# Altium PCB LCR.PcbDoc
Units mm, origin at the board's own origin, x right, y up, seen from the top; angles counter-clockwise.
Board outline 100 x 80 mm, 2 copper layers (Top, Bottom); 95 components, 118 nets, 438 pads, 285 vias.
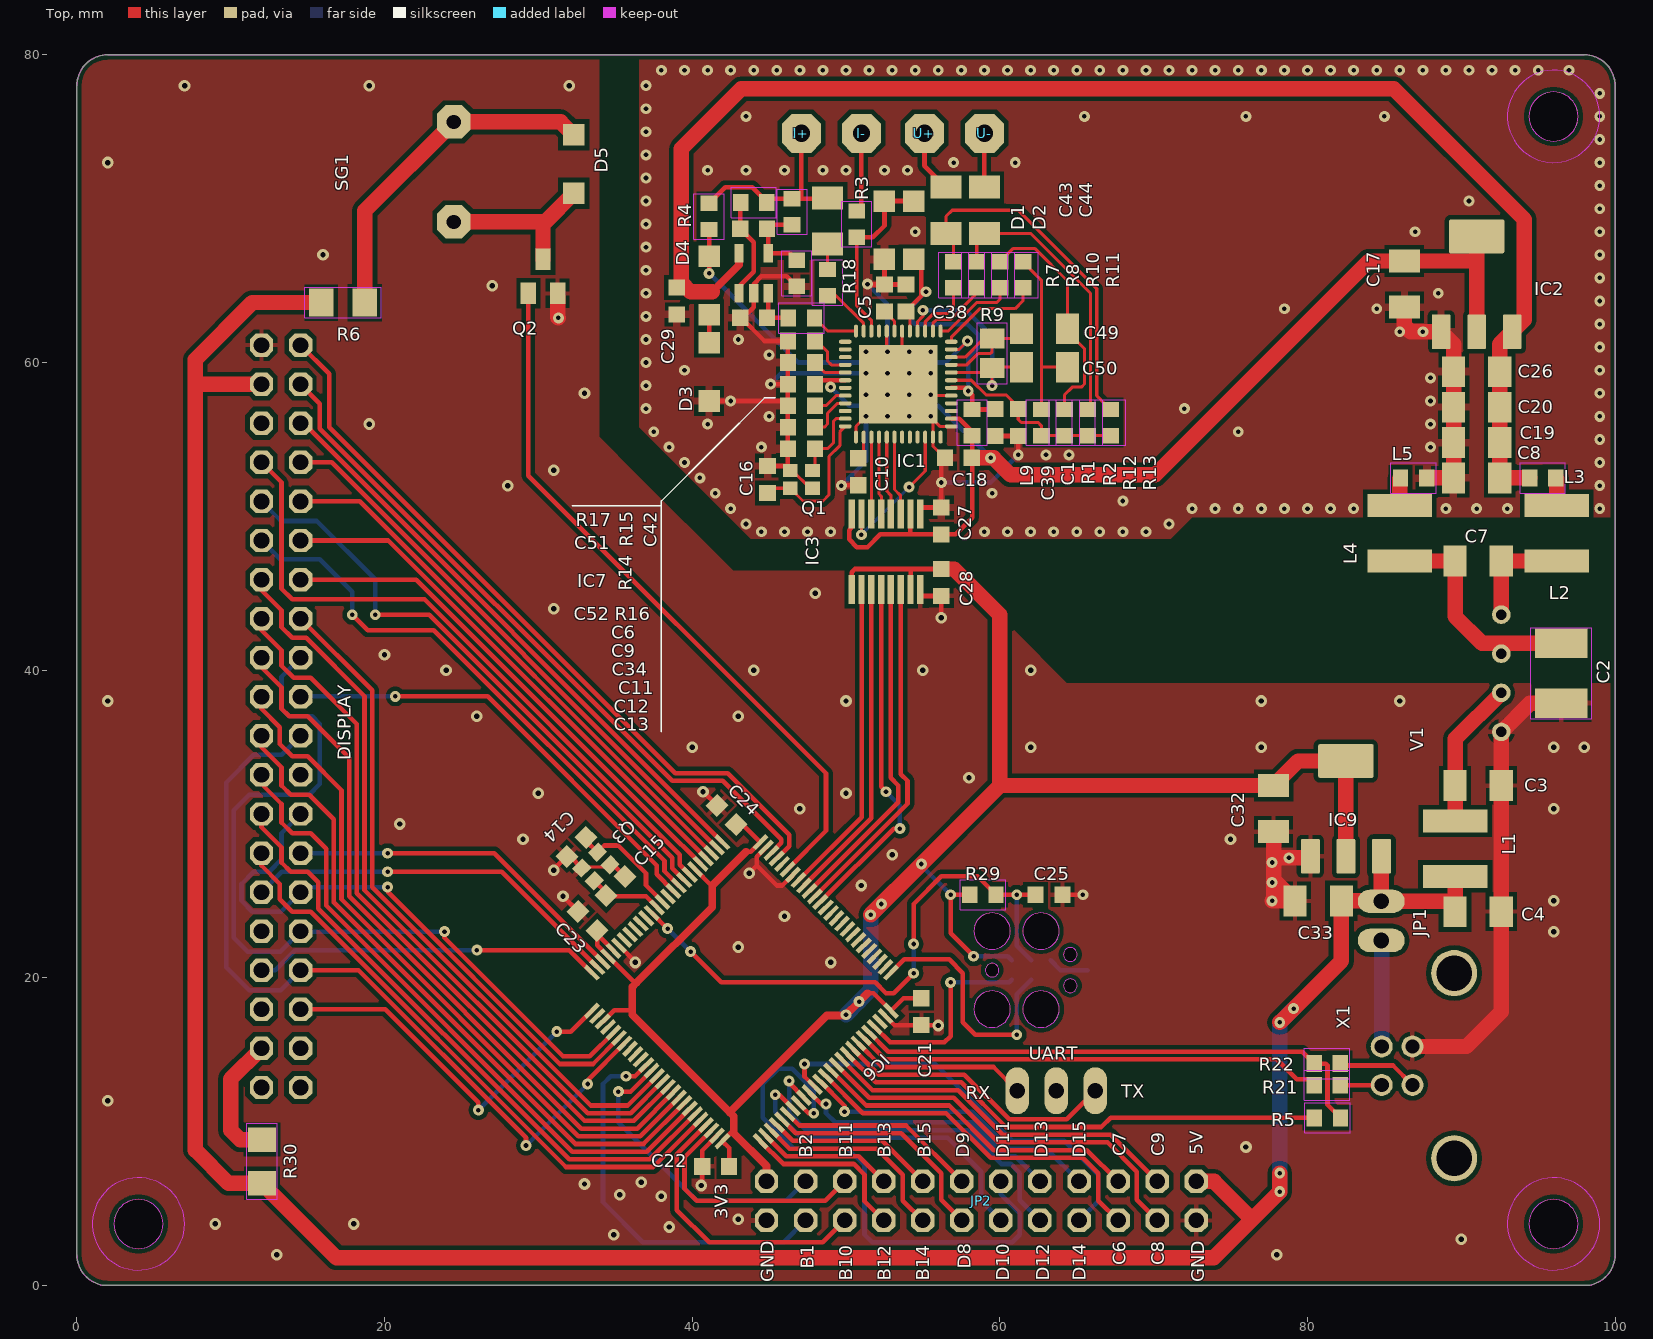
[diagram p0: Top view]
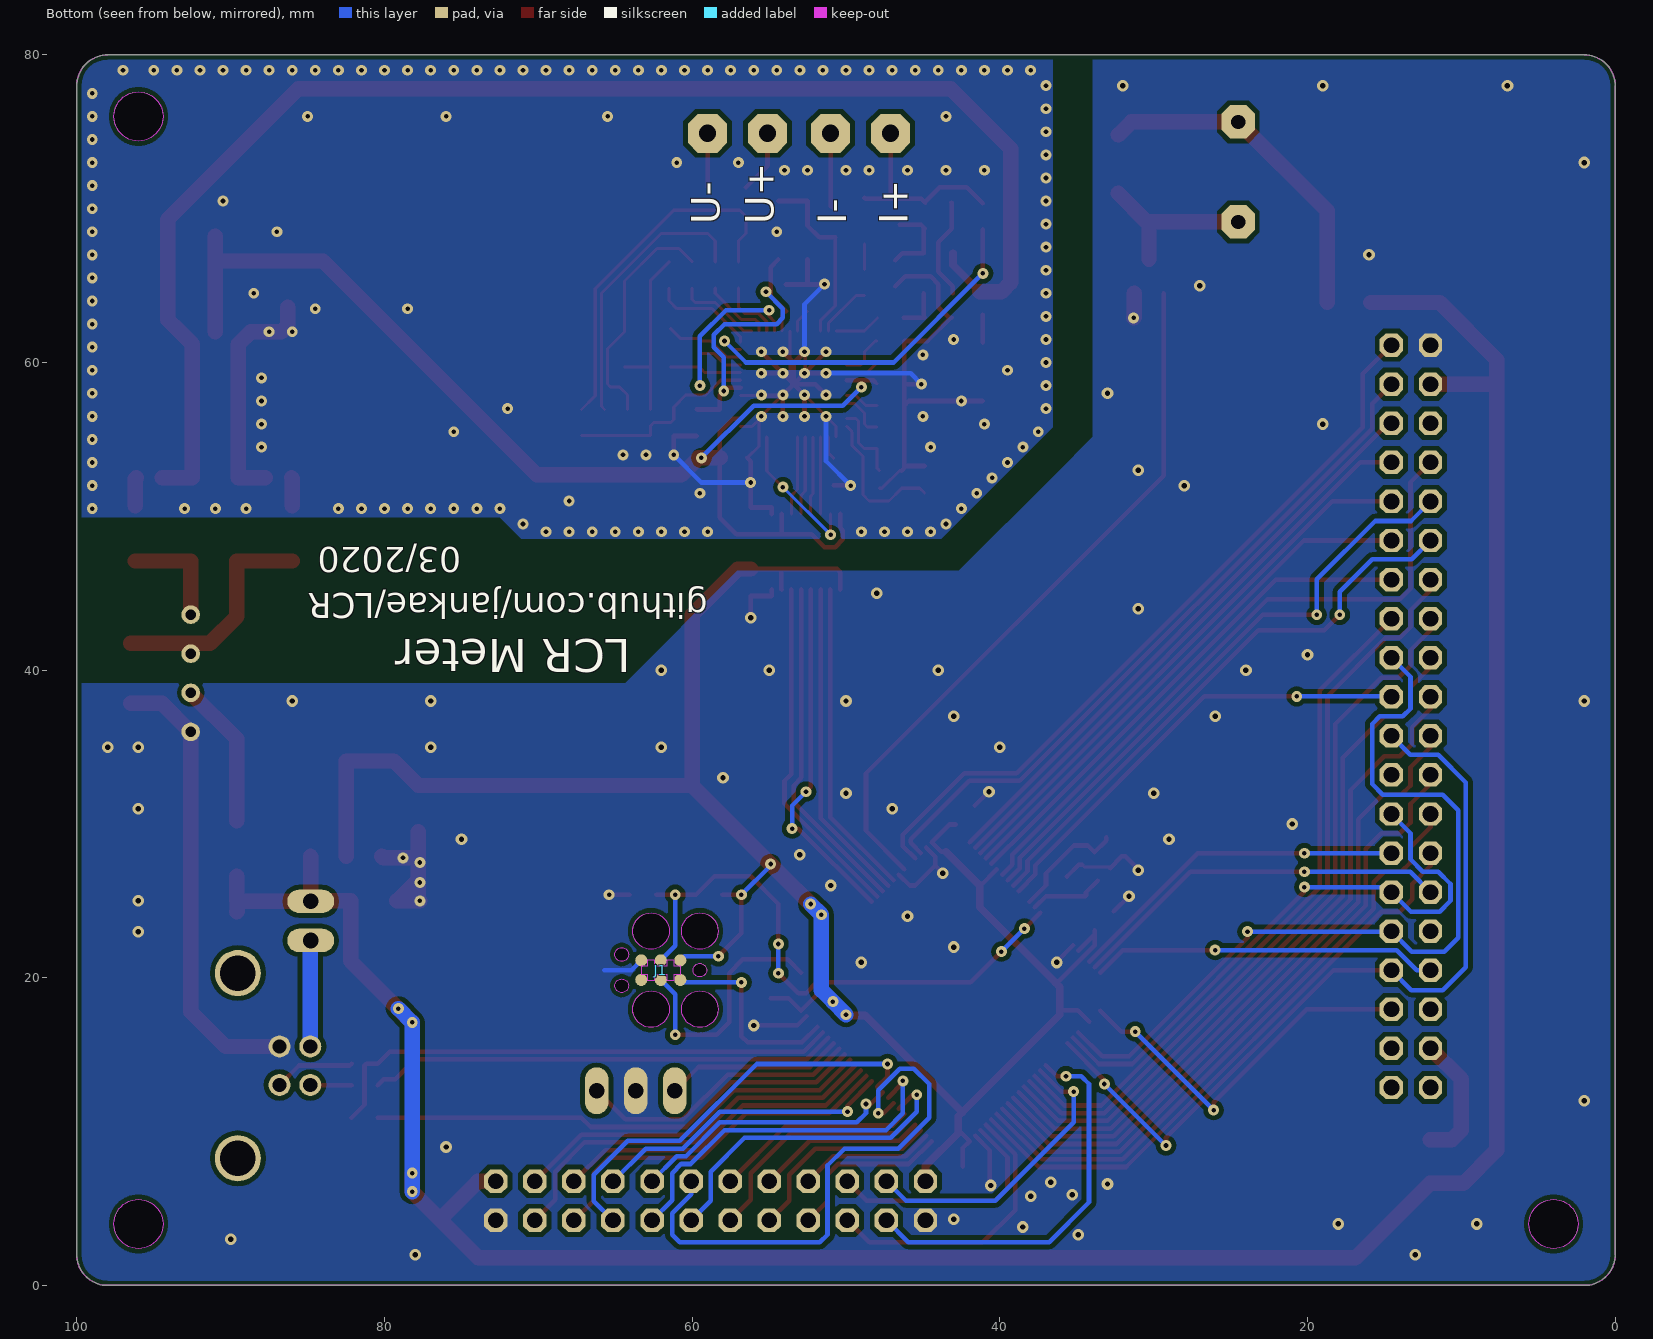
[diagram p1: Bottom view, seen from below]

## Layer stack, top to bottom
Top Solder: solder mask 0.0102, Solder Resist, Dk 3.5
Top: signal copper 0.035
Dielectric 1: dielectric 0.32, FR-4, Dk 4.8
Bottom: signal copper 0.035
Bottom Solder: solder mask 0.0102, Solder Resist, Dk 3.5

## Board outline
0,2 0,78 cw(c2,78) 2,80 98,80 cw(c98,78) 100,78 100,2 cw(c98,2) 98,0 2,0 cw(c2,2)
cut-out: 4,2.4 ccw(c4,4) 5.6,4 ccw(c4,4) 4,5.6 ccw(c4,4) 2.4,4 ccw(c4,4)
cut-out: 96,74.4 ccw(c96,76) 97.6,76 ccw(c96,76) 96,77.6 ccw(c96,76) 94.4,76 ccw(c96,76)
cut-out: 96,2.4 ccw(c96,4) 97.6,4 ccw(c96,4) 96,5.6 ccw(c96,4) 94.4,4 ccw(c96,4)
cut-out: 59.5,21.853 ccw(c59.5,23.04) 60.687,23.04 ccw(c59.5,23.04) 59.5,24.228 ccw(c59.5,23.04) 58.313,23.04 ccw(c59.5,23.04)
cut-out: 59.5,16.773 ccw(c59.5,17.96) 60.687,17.96 ccw(c59.5,17.96) 59.5,19.148 ccw(c59.5,17.96) 58.313,17.96 ccw(c59.5,17.96)
cut-out: 62.675,16.773 ccw(c62.675,17.96) 63.862,17.96 ccw(c62.675,17.96) 62.675,19.148 ccw(c62.675,17.96) 61.488,17.96 ccw(c62.675,17.96)
cut-out: 62.675,21.853 ccw(c62.675,23.04) 63.862,23.04 ccw(c62.675,23.04) 62.675,24.228 ccw(c62.675,23.04) 61.488,23.04 ccw(c62.675,23.04)
cut-out: 59.5,20.056 ccw(c59.5,20.5) 59.945,20.5 ccw(c59.5,20.5) 59.5,20.945 ccw(c59.5,20.5) 59.056,20.5 ccw(c59.5,20.5)
cut-out: 64.58,21.072 ccw(c64.58,21.516) 65.025,21.516 ccw(c64.58,21.516) 64.58,21.961 ccw(c64.58,21.516) 64.136,21.516 ccw(c64.58,21.516)
cut-out: 64.58,19.04 ccw(c64.58,19.484) 65.025,19.484 ccw(c64.58,19.484) 64.58,19.929 ccw(c64.58,19.484) 64.136,19.484 ccw(c64.58,19.484)

## Design rules (kind name [scope] priority, off if disabled: settings)
BoardOutlineClearance mdCopperDimension [All] p1: gap=0.254 ignorepadtopadclearanceinfootprint=FALSE except(0: Arc-SplitContinuation Track-SplitContinuation SMDPad-SplitContinuation THPad-SplitContinuation Via-SplitContinuation Fill-SplitContinuation Poly-SplitContinuation Region-SplitContinuation Text-SplitContinuation; 0.2: Poly-OutlineEdge Poly-CavityEdge Poly-CutoutEdge Poly-SplitBarrior)
Clearance Clearance_for_PolygonClass_Isolate_11.81 [InPolygonClass('Isolate_11.81') vs IsArc Or IsTrack Or IsPad Or IsVia Or IsFill Or IsRegion Or IsText] p1: gap=0.3 ignorepadtopadclearanceinfootprint=FALSE
Clearance "Clearance (Same Net)" [All] p2: gap=0.089 ignorepadtopadclearanceinfootprint=FALSE
Clearance [All] p3: gap=0.089 ignorepadtopadclearanceinfootprint=FALSE
HoleSize [All] p1: absolutevalues=TRUE maxlimit=2540 minlimit=0.3 maxpercent=80.000 minpercent=20.000
HoleToHoleClearance mdDrill [All] p1: gap=0.2 allowstackedmicrovias=TRUE
MinimumSolderMaskSliver [All] p1 off: minsoldermaskwidth=0.254
PasteMaskExpansion Expansion_SMDPaste_OFF [InPadClass('SMDPaste_OFF')] p1: expansion=0
PasteMaskExpansion mlMinCreamFrame [All] p2: expansion=0
PolygonConnect PolygonConnect_For_PolygonThermal_ON_Width196900_Gap100000 [InPolygonClass('PolygonThermal_ON_Width196900_Gap100000') vs Not IsVia] p1: connectstyle=Relief reliefconductorwidth=0.5 reliefentries=4 polygonreliefangle="90 Angle" airgapwidth=0.254
PolygonConnect PolygonConnect_For_PolygonThermal_ON_Width118100_Gap100000 [InPolygonClass('PolygonThermal_ON_Width118100_Gap100000') vs Not IsVia] p2: connectstyle=Relief reliefconductorwidth=0.3 reliefentries=4 polygonreliefangle="90 Angle" airgapwidth=0.254
PolygonConnect ThermalVias [IsVia] p3: connectstyle=Direct reliefconductorwidth=0.254 reliefentries=4 polygonreliefangle="90 Angle" airgapwidth=0.254
PolygonConnect [All] p4: connectstyle=Relief reliefconductorwidth=0.254 reliefentries=4 polygonreliefangle="90 Angle" airgapwidth=0.254
RoutingVias [All] p1: holewidth=0.3 width=0.706 viastyle="Through Hole" minholewidth=0.3 minwidth=0.706 maxholewidth=2.54 maxwidth=2.54
SolderMaskExpansion Expansion_SMDSolder_OFF [InPadClass('SMDSolder_OFF')] p1: expansion=0 istentingtop=FALSE
SolderMaskExpansion mlMinStopFrame [All] p2: expansion=0.102 istentingtop=FALSE
Width [All] p1: maxlimit=0.254 minlimit=0.152 preferedwidth=0.152
26 further rules are at their usual default settings.

## Classes and differential pairs
polygon class PolygonThermal_ON_Width196900_Gap100000: Polygon_1_Net_AGND Polygon_2_Net_AGND
polygon class PolygonThermal_ON_Width118100_Gap100000: Polygon_1_Net_GND Polygon_2_Net_GND
polygon class Isolate_11.81: Polygon_1_Net_AGND Polygon_1_Net_GND Polygon_2_Net_AGND Polygon_2_Net_GND
pad class SMDSolder_OFF: Q1-1 Q1-2 Q1-3 Q1-4 Q3-1 Q3-2 Q3-3 Q3-4
pad class SMDPaste_OFF: J1-1 J1-2 J1-3 J1-4 J1-5 J1-6 Q1-1 Q1-2 Q1-3 Q1-4 Q3-1 Q3-2 Q3-3 Q3-4

## Components (designator, comment, footprint, x,y, rotation, side; value= is the part's Value field where it differs from the comment)
C1 "470n" C0603K 61.2,56.1 r270 top
C2 "470p/3kV" C1812 96.5,39.8 r270 top
C3 "10u/16V" C1206K 91.1,32.5 r0 top
C4 "10u/16V" C1206K 91.1,24.3 r0 top
C5 "4u7" C0603K 52.5,64.2 r90 top
C6 "470n" C0603K 47.1,61.4 r180 top
C7 "10u/25V" C1206K 91.1,47.1 r180 top
C8 "10u/25V" C1206K 91,52.5 r180 top
C9 "470n" C0603K 47.1,60 r180 top
C10 "470n" C0603K 50.8,52.9 r270 top
C11 "100n" C0603K 47.1,57.2 r180 top
C12 "1u" C0603K 47.1,55.8 r180 top
C13 "10p" C0603K 47.1,54.4 r180 top
C14 "12p" C0603K 32.469,28.514 r225 top
C15 "12p" C0603K 35.014,25.969 r45 top
C16 "10p" C0603K 44.9,52.4 r90 top
C17 "10u/16V" C1206K 86.3,65.1 r270 top
C18 "100n" C0603K 57.3,53.8 r180 top
C19 "10u/25V" C1206K 91,54.8 r180 top
C20 "10u/25V" C1206K 91,57.1 r180 top
C21 "100n" C0603K 54.9,17.8 r90 top
C22 "100n" C0603K 41.53,7.733 r0 top
C23 "100n" C0603K 33.2,23.7 r315 top
C24 "100n" C0603K 42.241,30.583 r315 top
C25 "100n" C0603K 63.2,25.4 r0 top
C26 "10u/25V" C1206K 91,59.4 r180 top
C27 "100n" C0603K 56.2,49.7 r90 top
C28 "100n" C0603K 56.2,45.7 r270 top
C29 "1u" C0603K 39,64 r90 top
C32 "10u/16V" C1206K 77.8,31 r270 top
C33 "10u/16V" C1206K 80.7,25 r180 top
C34 "100n" C0603K 47.1,58.6 r180 top
C38 "100n" C0603K 53.9,64.2 r90 top
C39 "100n" C0603K 59.7,56.1 r270 top
C42 "10u" C1206K 48.8,69.2 r90 top
C43 "10u" C1206K 56.5,69.9 r90 top
C44 "10u" C1206K 59,69.9 r90 top
C49 "10u" C1206K 62.9,62.2 r180 top
C50 "10u" C1206K 62.9,59.7 r180 top
C51 "100n" C0603K 44,68.7 r180 top
C52 "100n" C0603K 44,62.9 r0 top
D1 "BAS116" SOD123 52.5,68.6 r270 top
D2 "BAS116" SOD123 54.4,68.6 r90 top
D3 "BAS116" SOD123 41.1,59.4 r90 top
D4 "BAS116" SOD123 41.1,65 r90 top
D5 "4148" SOD123 32.3,72.9 r270 top
DISPLAY "SAINSMART_TFT_3.2V" SAINSMART_ANGLED 12,37 r270 top
I+ "" 2,54/1,1 47.1,74.9 r90 top
I- "" 2,54/1,1 51,74.9 r90 top
IC1 "AD5941" QFN50P700X700X80-49T510N 53.4,58.6 r0 top
IC2 "VREG-TS1117CW-3V3" SOT223 91,65.1 r90 top
IC3 "SI8651EB-B-IU" SOP63P600X175-16N 52.6,47.7 r90 top
IC6 "STM32F303VCT" LQFP100 43.2,19.1 r225 top
IC7 "OPA237N" SOT23-5 44,65.8 r0 top
IC9 "VREG-TS1117CW-3V3" SOT223 82.5,31 r90 top
J1 "" TC2030-MCP 59.5,20.5 r0 bottom
JP1 "" 1X02 84.8,23.7 r270 top
JP2 "" 2X12 58.8,5.5 r0 top
L1 "SRN5020TA-100M" SRN5040 89.6,28.4 r90 top
L2 "SRN5020TA-100M" SRN5040 96.2,48.9 r90 top
L3 "Ferrite" R0603 95.3,52.5 r180 top
L4 "SRN5020TA-100M" SRN5040 86,48.9 r90 top
L5 "Ferrite" R0603 86.9,52.5 r0 top
L9 "Ferrite" R0603 58.2,56.1 r90 top
Q1 "FA-128" FA-128 47.1,52.4 r180 top
Q2 "BSS123" SOT23 30.3,65.6 r0 top
Q3 "FA-128" FA-128 33.741,27.241 r225 top
R1 "1M" R0603 62.7,56.1 r270 top
R2 "1M" R0603 64.2,56.1 r270 top
R3 "10" R0603 50.7,69 r270 top
R4 "100k" R0603 41.1,69.5 r270 top
R5 "1k5" R0603 81.3,10.9 r180 top
R6 "27" R1206 17.3,63.9 r180 top
R7 "10k" R0603 57,65.7 r90 top
R8 "10k" R0603 58.5,65.7 r90 top
R9 "1k 0.01% 2ppm" M0805 59.5,60.6 r270 top
R10 "10k" R0603 60,65.7 r90 top
R11 "10k" R0603 61.5,65.7 r90 top
R12 "1M" R0603 65.7,56.1 r270 top
R13 "1M" R0603 67.2,56.1 r270 top
R14 "10k" R0603 46.8,65.8 r90 top
R15 "39k" R0603 46.5,69.8 r270 top
R16 "10k" R0603 47.1,62.9 r0 top
R17 "100" R0603 44,70.4 r180 top
R18 "10" R0603 48.8,65.2 r270 top
R21 "22" R0603 81.28,13.018 r0 top
R22 "22" R0603 81.28,14.423 r0 top
R29 "10k" R0603 58.9,25.4 r0 top
R30 "27" R1206 12.035,8.062 r270 top
SG1 "CEM-1203(42)" F/QMBIII 24.5,72.4 r90 top
U+ "" 2,54/1,1 55.1,74.9 r90 top
U- "" 2,54/1,1 59,74.9 r90 top
UART "" 1X03 63.667,12.66 r0 top
V1 "TBA-1 0512" TME 92.6,39.8 r90 top
X1 "MINI-USB_SHIELD4P-85-32004-00X" 85-32004-00X 89.535,14.287 r180 top

## Footprints (in the part's own frame and the unit in brackets; to place one, negate y for a bottom-side part, rotate by r counter-clockwise, add the part's x,y. Pads: shape width x height; smd on the part's side, far side on the other; paste and mask are expansions set on the pad)
1X02 [mil] "1X02"
  oval 60x120 hole 40: 1(-50,0) 2(50,0)
1X03 [mil] "1X03"
  oval 60x120 hole 40: 1(-100,0) 2(0,0) 3(100,0)
2,54/1,1 [mil] "2,54/1,1"
  oct 100x100 / inner round 92.39 / far side oct 100x100 hole 44: 1(0,0)
2X12 [mil] "2X12"
  oct 60x60 / inner round 55.43 / far side oct 60x60 hole 40: 1(-550,-50) 2(-550,50) 3(-450,-50) 4(-450,50) 5(-350,-50) 6(-350,50) 7(-250,-50) 8(-250,50) 9(-150,-50) 10(-150,50) 11(-50,-50) 12(-50,50) 13(50,-50) 14(50,50) 15(150,-50) 16(150,50) 17(250,-50) 18(250,50) 19(350,-50) 20(350,50) 21(450,-50) 22(450,50) 23(550,-50) 24(550,50)
85-32004-00X [mm] "85-32004-00X"
  round 1.428 hole 0.92: 1(4.71,-1.25) 2(4.71,1.25) 3(2.71,1.25) 4(2.71,-1.25)
  round 3 hole 2.3: M1(0,6.02) M2(0,-6.02)
C0603K [mm] "C0603K"
  rect 1.05x1.08 smd: 1(-0.875,0) 2(0.875,0)
C1206K [mm] "C1206K"
  rect 1.5x2 smd: 1(-1.5,0) 2(1.5,0)
C1812 [mm] "C1812"
  rect 1.9x3.4 smd: 1(-1.95,0) 2(1.95,0)
  Top keep-out lines w0.051: 2.973,-1.983 2.973,1.983 -2.973,1.983 -2.973,-1.983 2.973,-1.983
F/QMBIII [mil] "F/QMBIII"
  oct 85x85 / inner round 78.53 / far side oct 85x85 hole 36: +(128,0) -(-128,0)
FA-128 [mm] "FA-128"
  rect 0.95x0.85 smd paste+0 mask+0: 1(-0.725,-0.575) 2(0.725,-0.575) 3(0.725,0.575) 4(-0.725,0.575)
LQFP100 [mm] "LQFP100"
  rect 0.3x1.2 smd: 1(-6,-7.75) 2(-5.5,-7.75) 3(-5,-7.75) 4(-4.5,-7.75) 5(-4,-7.75) 6(-3.5,-7.75) 7(-3,-7.75) 8(-2.5,-7.75) 9(-2,-7.75) 10(-1.5,-7.75) 11(-1,-7.75) 12(-0.5,-7.75) 13(0,-7.75) 14(0.5,-7.75) 15(1,-7.75) 16(1.5,-7.75) 17(2,-7.75) 18(2.5,-7.75) 19(3,-7.75) 20(3.5,-7.75) 21(4,-7.75) 22(4.5,-7.75) 23(5,-7.75) 24(5.5,-7.75) 25(6,-7.75) 51(6,7.75) 52(5.5,7.75) 53(5,7.75) 54(4.5,7.75) 55(4,7.75) 56(3.5,7.75) 57(3,7.75) 58(2.5,7.75) 59(2,7.75) 60(1.5,7.75) 61(1,7.75) 62(0.5,7.75) 63(0,7.75) 64(-0.5,7.75) 65(-1,7.75) 66(-1.5,7.75) 67(-2,7.75) 68(-2.5,7.75) 69(-3,7.75) 70(-3.5,7.75) 71(-4,7.75) 72(-4.5,7.75) 73(-5,7.75) 74(-5.5,7.75) 75(-6,7.75)
  rect 1.2x0.3 smd: 26(7.75,-6) 27(7.75,-5.5) 28(7.75,-5) 29(7.75,-4.5) 30(7.75,-4) 31(7.75,-3.5) 32(7.75,-3) 33(7.75,-2.5) 34(7.75,-2) 35(7.75,-1.5) 36(7.75,-1) 37(7.75,-0.5) 38(7.75,0) 39(7.75,0.5) 40(7.75,1) 41(7.75,1.5) 42(7.75,2) 43(7.75,2.5) 44(7.75,3) 45(7.75,3.5) 46(7.75,4) 47(7.75,4.5) 48(7.75,5) 49(7.75,5.5) 50(7.75,6) 76(-7.75,6) 77(-7.75,5.5) 78(-7.75,5) 79(-7.75,4.5) 80(-7.75,4) 81(-7.75,3.5) 82(-7.75,3) 83(-7.75,2.5) 84(-7.75,2) 85(-7.75,1.5) 86(-7.75,1) 87(-7.75,0.5) 88(-7.75,0) 89(-7.75,-0.5) 90(-7.75,-1) 91(-7.75,-1.5) 92(-7.75,-2) 93(-7.75,-2.5) 94(-7.75,-3) 95(-7.75,-3.5) 96(-7.75,-4) 97(-7.75,-4.5) 98(-7.75,-5) 99(-7.75,-5.5) 100(-7.75,-6)
M0805 [mm] "M0805"
  rect 1.3x1.6 smd: 1(-0.95,0) 2(0.95,0)
  Top keep-out lines w0.051: 1.973,-0.983 1.973,0.983 -1.973,0.983 -1.973,-0.983 1.973,-0.983
QFN50P700X700X80-49T510N [mm] "QFN50P700X700X80-49T510N"
  rrect100% 0.838x0.264 smd: 1(-3.446,2.75) 2(-3.446,2.25) 3(-3.446,1.75) 4(-3.446,1.25) 5(-3.446,0.75) 6(-3.446,0.25) 7(-3.446,-0.25) 8(-3.446,-0.75) 9(-3.446,-1.25) 10(-3.446,-1.75) 11(-3.446,-2.25) 12(-3.446,-2.75) 25(3.446,-2.75) 26(3.446,-2.25) 27(3.446,-1.75) 28(3.446,-1.25) 29(3.446,-0.75) 30(3.446,-0.25) 31(3.446,0.25) 32(3.446,0.75) 33(3.446,1.25) 34(3.446,1.75) 35(3.446,2.25) 36(3.446,2.75)
  rrect100% 0.264x0.838 smd: 13(-2.75,-3.446) 14(-2.25,-3.446) 15(-1.75,-3.446) 16(-1.25,-3.446) 17(-0.75,-3.446) 18(-0.25,-3.446) 19(0.25,-3.446) 20(0.75,-3.446) 21(1.25,-3.446) 22(1.75,-3.446) 23(2.25,-3.446) 24(2.75,-3.446) 37(2.75,3.446) 38(2.25,3.446) 39(1.75,3.446) 40(1.25,3.446) 41(0.75,3.446) 42(0.25,3.446) 43(-0.25,3.446) 44(-0.75,3.446) 45(-1.25,3.446) 46(-1.75,3.446) 47(-2.25,3.446) 48(-2.75,3.446)
  rect 5.1x5.1 smd: 49(0,0)
R0603 [mm] "R0603"
  rect 1x1.1 smd: 1(-0.85,0) 2(0.85,0)
  Top keep-out lines w0.051: 1.473,0.983 1.473,-0.983 -1.473,-0.983 -1.473,0.983 1.473,0.983
R1206 [mm] "R1206"
  rect 1.6x1.803 smd: 1(-1.422,0) 2(1.422,0)
  Top keep-out lines w0.051: 2.473,0.983 2.473,-0.983 -2.473,-0.983 -2.473,0.983 2.473,0.983
SAINSMART_ANGLED [mil] "SAINSMART_ANGLED"
  oct 60x60 / inner round 55.43 / far side oct 60x60 hole 40: 1(-950,0) 2(-950,100) 3(-850,0) 4(-850,100) 5(-750,0) 6(-750,100) 7(-650,0) 8(-650,100) 9(-550,0) 10(-550,100) 11(-450,0) 12(-450,100) 13(-350,0) 14(-350,100) 15(-250,0) 16(-250,100) 17(-150,0) 18(-150,100) 19(-50,0) 20(-50,100) 21(50,0) 22(50,100) 23(150,0) 24(150,100) 25(250,0) 26(250,100) 27(350,0) 28(350,100) 29(450,0) 30(450,100) 31(550,0) 32(550,100) 33(650,0) 34(650,100) 35(750,0) 36(750,100) 37(850,0) 38(850,100) 39(950,0) 40(950,100)
SOD123 [mm] "SOD123"
  rect 1.4x1.4 smd: A(1.9,0) C(-1.9,0)
SOP63P600X175-16N [mil] "SOP63P600X175-16N"
  rect 74.84x16.14 smd: 1(-96.67,87.5) 2(-96.67,62.5) 3(-96.67,37.5) 4(-96.67,12.5) 5(-96.67,-12.5) 6(-96.67,-37.5) 7(-96.67,-62.5) 8(-96.67,-87.5) 9(96.67,-87.5) 10(96.67,-62.5) 11(96.67,-37.5) 12(96.67,-12.5) 13(96.67,12.5) 14(96.67,37.5) 15(96.67,62.5) 16(96.67,87.5)
SOT23 [mm] "SOT23"
  rect 1x1.4 smd: 1(-0.95,-1.1) 2(0.95,-1.1) 3(0,1.1)
SOT23-5 [mm] "SOT23-5"
  rect 0.6x1.2 smd: 1(-0.95,-1.306) 2(0,-1.306) 3(0.95,-1.306) 4(0.95,1.306) 5(-0.95,1.306)
SOT223 [mm] "SOT223"
  rrect10% 2.235x1.219 smd: 1(-3.099,2.311) 2(-3.099,0) 3(-3.099,-2.311)
  rrect10% 2.2x3.6 smd: 4(3.099,0)
SRN5040 [mm] "SRN5040"
  rect 1.5x4.2 smd: P$1(-1.8,0) P$2(1.8,0)
TC2030-MCP [mil] "TC2030-MCP"
  rrect100% 31x31 smd paste+0: 1(50,-25) 2(50,25) 3(100,-25) 4(100,25) 5(150,-25) 6(150,25)
  Top keep-out region: 49.5,-10 65,-10 65,-25.5 85,-25.5 85,-10 115,-10 115,-25.5 135,-25.5 135,-10 150.5,-10 150.5,10 135,10 135,25.5 115,25.5 115,10 85,10 85,25.5 65,25.5 65,10 49.5,10
TME [mm] "TME"
  round 1.208 hole 0.7: 1(-3.81,0) 2(-1.27,0) 3(1.27,0) 4(3.81,0)

## Part data
C1 C5 C6 C9 C10 C11 C12 C13 C14 C15 C16 C18 C21 C22 C23 C24 C25 C27 C28 C29 C34 C38 C39 C51 C52: library part C0603K, PackageName=C0603K
C2: library part C1812, PackageName=C1812
C3 C4 C7 C8 C17 C19 C20 C26 C32 C33 C42 C43 C44 C49 C50: library part C1206K, PackageName=C1206K
D1 D2 D3 D4 D5: library part SOD123, PackageName=SOD123
DISPLAY: library part SAINSMART_ANGLED, PackageName=SAINSMART_ANGLED
I+ I- U+ U-: library part 2,54/1,1, PackageName=2,54/1,1
IC1: library part QFN50P700X700X80-49T510N, PackageName=QFN50P700X700X80-49T510N
IC2 IC9: library part SOT223, PackageName=SOT223
IC3: library part SOP63P600X175-16N, PackageName=SOP63P600X175-16N
IC6: library part LQFP100, PackageName=LQFP100
IC7: library part SOT23-5, PackageName=SOT23-5
J1: library part TC2030-MCP, PackageName=TC2030-MCP
JP1: library part 1X02, PackageName=1X02
JP2: library part 2X12, PackageName=2X12
L1 L2 L4: library part SRN5040, PackageName=SRN5040
L3 L5 L9 R1 R2 R3 R4 R5 R7 R8 R10 R11 R12 R13 R14 R15 R16 R17 R18 R21 R22 R29: library part R0603, PackageName=R0603
Q2: library part SOT23, PackageName=SOT23
R6 R30: library part R1206, PackageName=R1206
R9: library part M0805, PackageName=M0805
SG1: library part F/QMBIII, PackageName=F/QMBIII
UART: library part 1X03, PackageName=1X03
V1: library part TME, PackageName=TME
X1: library part 85-32004-00X, PackageName=85-32004-00X
Q1 Q3: PackageName=FA-128

## Free pads (board coordinates)
  round 0.889 hole 0.889 unplated: MH1(59.5,20.5) MH2(64.58,21.516) MH3(64.58,19.484)
  round 3.2 hole 3.2 unplated: MH1(96,4) MH2(96,76) MH3(4,4)
  round 2.375 hole 2.375 unplated: MH4(59.5,17.96) MH5(59.5,23.04) MH6(62.675,23.04) MH7(62.675,17.96)

## Via types
v1: diameter 0.706/0.706 (per signal layer), hole 0.3, Top to Bottom, 220 vias
v2: diameter 0.756/0.756 (per signal layer), hole 0.35, Top to Bottom, 65 vias

## Nets (pads, with @x,y where several pads share a name; then routed paths per layer and width w, separated by ;. In a path a pad name is that pad's centre, name@x,y a point inside that pad or via, vN(x,y) a via of type N, cw(c..) or ccw(c..) an arc to the next point about the centre after c; other vN are vias at no path point)
+3V3: C21.2 C22.2 C23.2 C24.2 C28.1 C32.1 IC3.1 IC3.7 IC6.6 IC6.21 IC6.22 IC6.28 IC6.50 IC6.75 IC6.100 IC9.2 IC9.4 J1.1 JP2.2 R29.1 | length 146.8
  Top w0.3: IC6.28 34.929,17.9 36.1,17.9 ; IC6.21 33.819,22.824 C23.2 33.819,22.117 IC6.22 36.236,19.7 36.4,19.7 ; IC6.6 41.25,26 41.3,26 ; C22.2 42.405,8.935 IC6.50 42.7,10.115 42.7,11 ; C24.2 43.296,29.964 IC6.100 43.815,28.2 43.5,28.2 ; IC3.1 50.378,46.378 50.575,46.575 54.2,46.575 ; 51.4,19 51.785,19 52.923,17.863 53.735,18.675 C21.2 ; IC3.7 54.2,45.257 54.2,46.575 ; C28.1 54.2,46.575 ; R29.1 v1(56.8,25.4) 56.8,22.9 v1(58.3,21.4)
  Top w0.5: 43.5,28.2 41.3,26 41.3,24.6 36.4,19.7 36.1,19.4 36.1,17.9 36.1,17.6 42.45,11.25 ; JP2.2 44.83,7.77 42.7,9.9 42.7,11 42.45,11.25 ; 51.4,19 v1(50.85,18.45) 49.95,17.55 48.75,17.55 42.45,11.25
  Top w1: v1(51.6,24.1) v1(54.9,27.4) 60,32.5 ; C28.1 57.025,46.575 60,43.6 60,32.5 ; IC9.2 IC9.4 79.399,34.099 C32.1 60,32.5
  Bottom w0.3: v1(54.9,27.4) 54.9,27.3 v1(56.8,25.4) ; v1(58.3,21.4) 60.505,21.4 J1.1
  Bottom w1: v1(50,17.6) v1(50.85,18.45) 51.6,19.2 v1(51.6,24.1) v1(52.3,24.8)
+5V: C4.1 C33.1 DISPLAY.3 IC9.3 JP1.1 JP2.24 L1.P$1 R6.2 R30.2 | length 180.9
  Top w1: DISPLAY.3 11.99,58.6 7.7,58.6 ; R6.2 11.4,63.9 7.7,60.2 7.7,58.6 ; JP2.24 73.93,6.77 76.4,4.3 ; v1(78.2,7.3) v1(78.2,6.1) 76.4,4.3 ; v1(78.2,17.1) 82.2,21.1 C33.1 84.77,25 JP1.1 ; IC9.3 84.8,27.89 JP1.1 ; C4.1 89.57,24.33 C4.1@89.57,24.97 ; L1.P$1 89.6,25 C4.1@89.57,24.97 ; 7.7,58.6 7.7,8.8 9.86,6.641 R30.2 16.876,1.8 73.9,1.8 76.4,4.3 ; JP1.1 C4.1@89.57,24.97
  Bottom w1: v1(78.2,6.1) v1(78.2,17.1) v1(79.1,18)
+12V: C8.1 C19.1 C20.1 C26.1 C29.2 IC2.3 IC7.5 L3.2 | length 94
  Top w0.152: C29.2 39.3,65.175 C29.2@39.3,65.2
  Top w0.5: 41.3,64.6 43.05,66.35 IC7.5
  Top w1: 41.3,64.6 39.9,64.6 39.3,65.2 39.3,73.9 43.2,77.8 85.6,77.8 94.1,69.3 94.1,62.79 IC2.3 92.5,61.19 C26.1 C20.1 C19.1 C8.1 L3.2
AD5941_CS: IC3.3 IC6.92 | length 21.1
  Top w0.3: IC6.92 51.648,30.376 IC3.3
AD5941_MISO: IC3.6 IC6.90 | length 22.6
  Top w0.3: IC6.90 54,31.314 54,32.8 53.553,33.248 IC3.6
AD5941_MOSI: IC3.5 IC6.91 | length 22.2
  Top w0.3: IC6.91 53.4,31.421 53.4,32.5 52.9,33 52.9,45.227 IC3.5
AD5941_RESET: IC3.2 IC6.93 | length 20.6
  Top w0.3: IC6.93 51.013,30.448 IC3.2
AD5941_SCLK: IC3.4 IC6.89 | length 23.2
  Top w0.3: IC6.89 53.093,29.7 v1(53.5,29.7) ; IC3.4 52.283,32.418 v1(52.6,32.1)
  Bottom w0.3: v1(52.6,32.1) 53.5,31.2 v1(53.5,29.7)
AGND: C1.2 C5.2 C6.2 C8.2 C9.2 C10.2 C11.2 C12.2 C13.2 C16.2 C17.2 C18.2 C19.2 C20.2 C26.2 C27.2 C29.1 C34.2 C38.2 C39.2 C52.1 D1.A D3.C IC1.13 IC1.23 IC1.25 IC1.29 IC1.42 IC1.44 IC1.49 IC2.1 IC3.9 IC7.2 L5.2 Q1.2 Q1.4 R14.1 | length 133.4
  Top w0.2: Q1.2 46.525,52.975 47.675,51.825 Q1.4 ; IC1.13 50.65,55.85 v1(51.3,56.5) IC1.49@53.25,58.45 ; IC1.44 52.65,60.7 52.65,59.35 IC1.49@53.5,58.5 ; IC1.42 53.65,58.85 IC1.49@53.25,58.45 ; C18.2 55.65,54.575 IC1.23 IC1.49@55.65,56.3 ; IC1.25 56.1,55.85 IC1.49@55.65,56.3 ; IC1.29 55.4,57.85 54.6,57.85 IC1.49@54.15,57.85 ; IC1.49@53.25,58.45 IC1.49 ; IC1.49 IC1.49@53.5,58.5 ; IC1.49 IC1.49@53.5,58.5 ; IC1.49@53.5,58.5 IC1.49@53.55,58.45 ; IC1.49@53.5,58.5 IC1.49@53.55,58.45 ; IC1.49@53.55,58.45 IC1.49@53.6,58.4 ; IC1.49@53.55,58.45 IC1.49@53.6,58.4 ; IC1.49@53.6,58.4 IC1.49@54.15,57.85 ; IC1.49@53.6,58.4 IC1.49@54.15,57.85 ; IC1.49@54.15,57.85 54.2,57.8 v1(55.5,56.5) 55.65,56.35 IC1.49@55.65,56.3
  Top w0.3: D3.C 45.925,57.5 C11.2 ; C52.1 C52.1@43.2,62.9 ; C16.2 46.075,53.275 Q1.2@46.175,53.175 ; v1(45.1,58.6) C34.2 ; Q1.2 Q1.2@46.175,53.175 ; R14.1 46.15,65.6 44.5,65.6 44,65.1 IC7.2 44,63.6 43.3,62.9 C52.1@43.2,62.9 ; v1(49.7,52) 49.725,52.025 C10.2 ; v1(51.3,57.9) 52,58.6 IC1.49 ; v1(51.3,59.3) v1(52.7,59.3) IC1.49 ; v1(51.3,60.7) IC1.49 ; v1(51.4,65.1) 51.425,65.075 C5.2 ; D1.A C5.2 ; IC1.49@52.65,60.7 53.4,59.95 IC1.49 ; v1(52.7,56.5) v1(52.7,57.9) IC1.49 ; v1(52.7,60.7) IC1.49@53.4,60 ; C38.2 C5.2 ; v1(54.1,56.5) v1(54.1,57.9) IC1.49 ; v1(54.1,60.7) IC1.49@53.4,60 ; IC1.49@54.6,57.85 IC1.49@54.15,57.85 ; IC3.9 54.823,50.575 C27.2 v1(56.2,52.2) 56.2,53.575 C18.2 ; IC1.49@55.4,57.85 IC1.49@54.15,57.85 ; v1(55.5,59.3) v1(54.1,59.3) IC1.49 ; v1(55.5,60.7) 53.65,58.85 IC1.49 ; C39.2 C1.2 v1(61.2,54) ; C52.1@43.2,62.9 44.7,61.4 C6.2 C9.2 C34.2 ; Q1.2@46.175,53.175 46.225,53.225 C13.2 C12.2 C11.2 ; C11.2 C34.2 ; IC1.49 54.2,57.8 IC1.49@54.15,57.85 ; IC1.49 IC1.49@53.4,60 ; IC1.49 IC1.49@53.4,60 ; IC1.49 IC1.49@53.6,58.4 ; IC1.49 IC1.49@53.55,58.45 ; IC1.49 IC1.49@53.55,58.45 ; IC1.49 IC1.49@53.55,58.45 ; IC1.49@53.55,58.45 IC1.49@53.6,58.4 ; IC1.49@53.55,58.45 IC1.49@53.6,58.4 ; IC1.49@53.55,58.45 IC1.49@53.6,58.4 ; IC1.49@53.6,58.4 IC1.49@54.15,57.85 ; IC1.49@53.6,58.4 IC1.49@54.15,57.85 ; IC1.49@53.6,58.4 IC1.49@54.15,57.85
  Top w1: C17.2 86.3,62.4 86.699,62.001 IC2.1 89.5,61.19 C26.2 C20.2 C19.2 C8.2 L5.2
  Bottom w0.3: v1(45.1,58.6) 45.8,59.3 v1(51.3,59.3) ; v1(49.7,52) 51.3,53.6 v1(51.3,56.5) ; v1(51.4,65.1) 52.7,63.8 v1(52.7,60.7) ; v1(56.2,52.2) 59.4,52.2 v1(61.2,54)
  other v1: 44.5,49 46,49 47.5,49 49,49 59,49 60.5,49 62,49 63.5,49 65,49 66.5,49 68,49 69.5,49 43.5,49.5 71,49.5 42.5,50.5 72.5,50.5 74,50.5 75.5,50.5 77,50.5 78.5,50.5 80,50.5 81.5,50.5 83,50.5 89,50.5 91,50.5 93,50.5 99,50.5 68,51 41.5,51.5 59.5,51.5 99,52 40.5,52.5 39.5,53.5 99,53.5 63,54 64.5,54 38.5,54.5 44.5,54.5 88,54.5 99,55 37.5,55.5 75.5,55.5 41,56 88,56 45,56.5 99,56.5 37,57 72,57 42.5,57.5 88,57.5 55.5,57.9 99,58 37,58.5 88,59 39.5,59.5 99,59.5 37,60 45,60.5 99,61 37,61.5 43,61.5 86,62 87.5,62 99,62.5 37,63 78.5,63.5 84.5,63.5 99,64 37,64.5 88.5,64.5 99,65.5 37,66 99,67 37,67.5 54.5,68.5 87,68.5 99,68.5 37,69 99,70 37,70.5 90.5,70.5 99,71.5 37,72 41,72.5 43.5,72.5 46,72.5 48.5,72.5 50,72.5 52.5,72.5 54,72.5 57,73 61,73 99,73 37,73.5 99,74.5 37,75 43.5,76 65.5,76 76,76 85,76 99,76 37,76.5 99,77.5 37,78 38,79 39.5,79 41,79 42.5,79 44,79 45.5,79 47,79 48.5,79 50,79 51.5,79 53,79 54.5,79 56,79 57.5,79 59,79 60.5,79 62,79 63.5,79 65,79 66.5,79 68,79 69.5,79 71,79 72.5,79 74,79 75.5,79 77,79 78.5,79 80,79 81.5,79 83,79 84.5,79 86,79 87.5,79 89,79 90.5,79 92,79 93.5,79 95,79 97,79
EXT_3: IC6.36 JP2.3 | length 25.9
  Top w0.3: v1(35.7,13.6) 36.286,13.6 IC6.36
  Bottom w0.3: v1(35.7,13.6) 34.7,13.6 34.2,13.1 34.2,5.4 36.8,2.8 45.94,2.8 JP2.3
EXT_4: IC6.37 JP2.4 | length 19.5
  Top w0.3: v1(35.2,12.6) 35.993,12.6 IC6.37
  Bottom w0.3: v1(35.2,12.6) 35.2,10.6 40.3,5.5 46.1,5.5 JP2.4
EXT_5: IC6.47 JP2.5 | length 18.7
  Top w0.3: IC6.47 39,8.536 39,4.9 41.1,2.8 48.48,2.8 JP2.5
EXT_6: IC6.48 JP2.6 | length 15.8
  Top w0.3: IC6.48 39.5,8.329 39.5,6.3 40.3,5.5 48.64,5.5 JP2.6
EXT_7: IC6.51 JP2.7 | length 11.2
  Top w0.3: IC6.51 45.915,7.9 50.5,7.9 51.2,7.2 51.2,5.48 JP2.7
EXT_8: IC6.52 JP2.8 | length 8.9
  Top w0.3: IC6.52 46.122,8.4 50.82,8.4 JP2.8
EXT_9: IC6.53 JP2.9 | length 13.3
  Top w0.3: IC6.53 46.329,8.9 52,8.9 53.7,7.2 53.7,5.52 JP2.9
EXT_10: IC6.54 JP2.10 | length 11
  Top w0.3: IC6.54 46.536,9.4 52.36,9.4 JP2.10
EXT_11: IC6.55 JP2.11 | length 15.4
  Top w0.3: IC6.55 46.743,9.9 53.6,9.9 56.2,7.3 56.2,5.56 JP2.11
EXT_12: IC6.56 JP2.12 | length 13.1
  Top w0.3: IC6.56 46.95,10.4 53.9,10.4 JP2.12
EXT_13: IC6.57 JP2.13 | length 21.3
  Top w0.3: v1(45.4,12.4) 45.657,12.4 IC6.57
  Bottom w0.3: v1(45.4,12.4) 45.4,11.3 47.1,9.6 56.6,9.6 58.8,7.4 58.8,5.5 JP2.13
EXT_14: IC6.58 JP2.14 | length 36.1
  Top w0.3: IC6.58 47.565,11.2 v1(47.9,11.2)
  Bottom w0.3: v1(47.9,11.2) 47.9,12.7 46.5,14.1 45.6,14.1 44.6,13.1 44.6,10.9 46.6,8.9 50.1,8.9 51.2,7.8 51.2,3.3 51.7,2.8 60.8,2.8 61.3,3.3 61.3,4.7 60.07,5.93 JP2.14
EXT_15: IC6.59 JP2.15 | length 23.8
  Top w0.3: v1(46.3,13.3) 46.3,13.172 IC6.59
  Bottom w0.3: v1(46.3,13.3) 46.3,11.2 47.4,10.1 57.9,10.1 60.1,7.9 60.7,7.9 61.3,7.3 61.3,5.54 JP2.15
EXT_16: IC6.60 JP2.16 | length 17.8
  Top w0.3: IC6.60 48.379,11.8 v1(48.7,11.8)
  Bottom w0.3: v1(48.7,11.8) 48.7,11.2 49.3,10.6 58.2,10.6 60.4,8.4 61,8.4 62.61,6.79 JP2.16
EXT_17: IC6.61 JP2.17 | length 27.3
  Top w0.3: v1(47.3,14.4) 47.3,13.586 IC6.61
  Bottom w0.3: v1(47.3,14.4) 55.8,14.4 60.8,9.4 64.2,9.4 66.4,7.2 66.4,5.48 JP2.17
EXT_18: IC6.62 JP2.18 | length 19.7
  Top w0.3: IC6.62 49.9,11.693 v1(49.9,11.3)
  Bottom w0.3: v1(49.9,11.3) 58.2,11.3 60.6,8.9 63.02,8.9 JP2.18
EXT_19: IC6.63 JP2.19 | length 23.9
  Top w0.3: IC6.63 51.1,11.2 56.5,11.2 59.4,8.3 65.4,8.3 66.4,7.3 66.4,5.52 JP2.19
EXT_20: IC6.64 JP2.20 | length 21.6
  Top w0.3: IC6.64 51.307,11.7 56.7,11.7 59.6,8.8 65.66,8.8 JP2.20
EXT_21: IC6.65 JP2.21 | length 26.1
  Top w0.3: IC6.65 51.514,12.2 57,12.2 59.9,9.3 67,9.3 68.9,7.4 68.9,5.56 JP2.21
EXT_22: IC6.66 JP2.22 | length 23.8
  Top w0.3: IC6.66 51.721,12.7 57.3,12.7 60.2,9.8 67.2,9.8 JP2.22
GND: C2.2 C3.2 C4.2 C14.2 C15.2 C21.1 C22.1 C23.1 C24.1 C25.2 C28.2 C32.2 C33.2 DISPLAY.1 IC3.8 IC6.20 IC6.49 IC6.74 IC6.94 IC6.99 IC9.1 J1.5 JP2.1 JP2.23 Q2.2 Q3.2 Q3.4 UART.2 V1.1 X1.4 | length 71.5
  Top w0.2: Q3.2 32.887,27.2 34.513,27.2 Q3.4
  Top w0.3: v2(31,27) 31,27.046 31.85,27.896 32.062,27.896 Q3.2 ; v2(31.6,25.3) C23.1 ; Q3.4 34.873,27.347 C15.2@35.633,26.587 ; IC6.20 36.3,21.05 v2(36.3,21) ; v2(40.6,6.5) 40.655,6.5 C22.1 40.655,8.777 IC6.49 ; v2(40.7,32.1) 40.724,32.1 C24.1 ; v2(43.7,26.8) 44.2,27.3 ; IC6.99 44.2,27.878 44.2,27.3 ; IC6.94 45.857,26 45.5,26 44.2,27.3 ; IC6.74@52.569,17.509 53.153,16.925 C21.1 56,16.925 v2(56,16.9) ; IC3.8 54.823,44.825 C28.2 v2(56.2,43.4) ; C25.2 v1(65.4,25.4)
  Top w1: Q2.2 31.25,62.95 v1(31.3,62.9) ; C32.2 v1@77.8,27.8 ; IC9.1 80.088,27.8 v1@77.8,27.8 ; X1.4 90.337,15.537 92.6,17.8 C4.2 C3.2 V1.1 94.46,37.85 C2.2 ; v1@77.8,26.4 77.8,25.1 v1(77.7,25) C33.2 v1@77.8,26.4 ; v1@77.8,26.4 v1@77.8,27.8
  Bottom w0.3: J1.5 63.945,20.5 65.7,20.5
  other v1: 77.7,26.2 77.7,27.5 78.8,27.8
  other v2: 13,2 78,2 90,3 34.9,3.3 38.5,3.8 9,4 18,4 43,4.3 38,5.8 35.3,5.9 33,6.6 36.7,6.7 76,9 2,12 49,21 43,22 96,23 46,24 96,25 51,26 53,28 29,29 75,29 21,30 47,31 96,31 30,32 50,32 58,33 40,35 62,35 77,35 96,35 98,35 26,37 43,37 2,38 50,38 77,38 86,38 24,40 44,40 55,40 62,40 20,41 31,44 48,45 28,52 31,53 19,56 33,58 27,65 16,67 2,73 7,78 19,78 32,78
I+: C42.2 I+.1 R4.1 R15.1 R17.1 | length 13
  Top w0.3: R4.1 42.15,71.4 43.9,71.4 R17.1@44.875,70.425 ; R17.1@44.85,70.4 R17.1@44.875,70.425 ; I+.1 47.1,70.85 R15.1@46.9,70.65 ; C42.2 48.75,70.65 R15.1@46.9,70.65 ; R17.1@44.875,70.425 45.1,70.65 R15.1 R15.1@46.9,70.65
I-: I-.1 R3.1 | length 5.2
  Top w0.2: R3.1 R3.1@51,70.15
  Top w0.3: R3.1@51,70.15 I-.1
N$1: C1.1 IC1.31 R1.2 R2.2 R12.2 R13.2 | length 12.7
  Top w0.2: IC1.31 58.15,58.85 59.1,57.9 60.4,57.9 61.2,57.1 C1.1 61.2,56.3 61.4,56.1 62.5,56.1 62.7,55.9 R1.2 R2.2 R12.2 R13.2
N$2: C6.1 IC1.4 | length 3
  Top w0.2: C6.1 48.1,61.4 48.8,60.7 48.8,60.1 49.05,59.85 IC1.4
N$3: C5.1 IC1.43 | length 1.5
  Top w0.2: C5.1 53.15,62.675 IC1.43
N$4: C9.1 IC1.5 | length 2.2
  Top w0.2: C9.1 48.625,59.35 IC1.5
N$5: C10.1 IC1.14 | length 1.5
  Top w0.2: C10.1 51.15,54.125 IC1.14
N$6: C11.1 IC1.8 | length 2.2
  Top w0.2: C11.1 48.7,57.2 49.35,57.85 IC1.8
N$7: C12.1 IC1.9 | length 3
  Top w0.2: C12.1 48.6,55.8 48.8,56 48.8,56.7 49.45,57.35 IC1.9
N$8: C16.1 IC1.12 Q1.3 | length 9.5
  Top w0.2: C16.1 45.2,51.825 Q1.3 47.2,51 48.5,51 48.9,51.4 48.9,53.9 49.6,54.6 49.6,55.496 IC1.12
N$9: C13.1 IC1.11 Q1.1 | length 5.1
  Top w0.2: Q1.1 47.975,53.125 C13.1 48.8,54.4 49.2,54.8 49.2,56.2 49.35,56.35 IC1.11
N$10: IC1.17 IC3.12 | length 5.1
  Top w0.2: IC1.17 52.65,51.65 52.918,51.382 IC3.12
N$11: C42.1 R18.1 | length 1.6
  Top w0.2: R18.1 C42.1
N$12: IC1.22 IC3.15 | length 9.4
  Top w0.2: v1(51,48.8) 51.013,48.812 IC3.15 ; v1(54.1,51.9) 55.15,52.95 IC1.22
  Bottom w0.2: v1(51,48.8) v1(54.1,51.9)
N$13: IC1.15 IC3.14 | length 5
  Top w0.2: IC3.14 51.65,50.158 IC1.15
N$14: IC1.16 IC3.13 | length 5.1
  Top w0.2: IC1.16 52.15,51.45 52.3,51.3 52.3,50.173 IC3.13
N$15: IC1.18 IC3.11 | length 5.2
  Top w0.2: IC1.18 53.15,51.75 53.553,51.348 IC3.11
N$16: C38.1 C39.1 D2.C IC1.30 IC1.41 L9.2 | length 20.7
  Top w0.2: C38.1 54.15,63.075 IC1.41
  Top w0.3: C38.1 54.9,64.325 v1@54.9,64.6 ; D2.C 54.9,66.2 v1@54.9,64.6 ; v1(55.2,64.6) v1@54.9,64.6 ; IC1.30 57.75,58.35 v1(57.95,58.15) 58.2,57.9 L9.2 59.675,56.95 C39.1
  Bottom w0.3: v1(55.2,64.6) 54.1,63.5 54.1,62.9 54.5,62.5 57.9,62.5 58.6,61.8 58.6,61 57.95,60.35 v1(57.95,58.15)
N$17: IC1.47 R18.2 | length 3.6
  Top w0.2: R18.2 49.35,64.35 51.15,62.55 IC1.47
N$18: IC1.39 R7.1 | length 4.1
  Top w0.2: IC1.39 55.15,62.641 55.289,62.78 55.289,62.789 55.7,63.2 56.6,63.2 57,63.6 R7.1
N$19: IC1.38 R8.1 | length 4.5
  Top w0.2: IC1.38 55.65,62.55 55.9,62.8 56.8,62.8 58.5,64.5 R8.1
N$20: C3.1 L1.P$2 V1.2 | length 9.6
  Top w1: L1.P$2 C3.1 89.6,35.53 V1.2
N$21: C44.1 R8.2 R12.1 | length 18.2
  Top w0.2: R8.2 58.5,67.9 C44.1 62,68.4 65.9,64.5 65.9,57.15 R12.1
N$23: C43.1 R7.2 R13.1 | length 23.5
  Top w0.2: R7.2 57,67.9 C43.1 56.5,69.5 56.9,69.9 61.2,69.9 66.3,64.8 66.3,57.85 R13.1
N$24: C49.2 IC1.33 IC1.34 R9.1 | length 9.1
  Top w0.2: IC1.33 57.85,59.85 58.6,60.6 59.4,60.6 59.5,60.7 R9.1@59.5,61.4 ; IC1.34 57.75,60.35 58.8,61.4 R9.1@59.5,61.4 ; C49.2 60.75,61.55 R9.1 R9.1@59.5,61.4
N$25: C7.1 L2.P$1 V1.4 | length 7.1
  Top w1: V1.4 C7.1 L2.P$1
N$26: C2.1 C7.2 L4.P$1 V1.3 | length 15.5
  Top w1: L4.P$1 C7.2 89.6,43.5 91.35,41.75 92.6,41.75 ; V1.3 92.6,41.75 ; C2.1 92.6,41.75
N$27: IC1.37 R10.1 | length 5.5
  Top w0.2: IC1.37 56.646,62.046 58.5,63.9 59.8,63.9 60,64.1 R10.1
N$28: IC1.36 R11.1 | length 6.8
  Top w0.2: IC1.36 56.846,61.646 58.7,63.5 61,63.5 61.5,64 R11.1
N$29: C50.1 R1.1 R11.2 | length 11.8
  Top w0.2: R11.2 62.7,65.35 62.7,59.7 ; R1.1 62.7,59.7 ; C50.1 62.7,59.7
N$30: C49.1 R2.1 R10.2 | length 15.3
  Top w0.2: R10.2 60.85,67.4 62.3,67.4 64.4,65.3 C49.1 64.4,62 65.5,60.9 65.5,58.6 65.3,58.4 64.7,58.4 64.2,57.9 R2.1
N$31: IC1.48 R16.2 | length 3.1
  Top w0.2: R16.2 48.804,62.046 IC1.48
N$32: C52.2 IC7.3 R16.1 | length 3
  Top w0.3: IC7.3 44.95,62.975 C52.2 R16.1
N$33: C51.1 IC7.4 R14.2 R15.2 | length 5.4
  Top w0.3: R15.2 45.125,68.95 C51.1 44.95,68.625 IC7.4 46.344,67.106 R14.2
N$34: C51.2 IC7.1 R17.2 | length 6.7
  Top w0.3: IC7.1 43.05,64.95 44,65.9 44,67.825 C51.2 43.125,70.375 R17.2
N$35: D1.C D2.A IC1.46 R3.2 | length 12.1
  Top w0.2: R3.2 50.7,63.7 51.65,62.75 IC1.46
  Top w0.3: R3.2 51.75,68.15 52.5,68.9 D1.C D2.A
N$36: L2.P$2 L3.1 | length 1.8
  Top w1: L3.1 96.2,52.45 L2.P$2
N$37: D4.A IC1.35 R4.2 | length 23.9
  Top w0.2: IC1.35 57.35,60.85 v1(57.9,61.4)
  Top w0.3: v1(41.1,65.8) D4.A R4.2
  Bottom w0.3: v1(41.1,65.8) 46.9,60 56.5,60 v1(57.9,61.4)
N$38: IC6.95 Q2.1 | length 46.5
  Top w0.3: Q2.1 29.35,52.65 48.7,33.3 48.7,29.55 IC6.95
N$39: D3.A D4.C | length 1.8
  Top w0.3: D3.A D4.C@41.1,63.1
N$41: DISPLAY.2 IC6.97 | length 48.8
  Top w0.3: DISPLAY.2 16.4,59.27 16.4,55.8 38.9,33.3 42.3,33.3 46.3,29.3 46.3,28.564 IC6.97
N$43: DISPLAY.4 IC6.98 | length 45.6
  Top w0.3: DISPLAY.4 15.8,57.33 15.8,55.7 38.7,32.8 42,32.8 45.8,29 45.8,28.771 IC6.98
N$44: DISPLAY.6 IC6.1 | length 38.7
  Top w0.3: DISPLAY.6 14.735,56.05 IC6.1
N$45: DISPLAY.8 IC6.2 | length 37.4
  Top w0.3: DISPLAY.8 16.568,53.51 IC6.2
N$46: DISPLAY.22 DISPLAY.34 IC6.32 | length 53.1
  Top w0.3: DISPLAY.34 18.31,20.49 29.2,9.6 v1(29.2,9.1) ; v1(33.2,13.1) 33.2,13.343 IC6.32
  Bottom w0.3: DISPLAY.34 13.25,19.2 11.2,19.2 9.7,20.7 9.7,32.7 11.5,34.5 13.31,34.5 DISPLAY.22 ; v1(29.2,9.1) v1(33.2,13.1)
N$47: DISPLAY.10 IC6.3 | length 36.2
  Top w0.3: DISPLAY.10 18.401,50.97 IC6.3
N$48: DISPLAY.12 IC6.4 | length 34.9
  Top w0.3: DISPLAY.12 20.234,48.43 IC6.4
N$49: DISPLAY.14 IC6.5 | length 33.7
  Top w0.3: DISPLAY.14 22.067,45.89 38.128,29.828 IC6.5
N$50: DISPLAY.16 IC6.38 | length 44.6
  Top w0.3: DISPLAY.16 19.2,38.69 19.2,25.9 33.4,11.7 35.8,11.7 IC6.38
N$51: DISPLAY.26 DISPLAY.30 IC6.31 | length 39
  Top w0.3: v1(20.2,25.9) 20.2,25.6 31.4,14.4 33.55,14.4 IC6.31@35.245,16.095
  Bottom w0.3: DISPLAY.26 13.3,29.41 13.3,27.7 12.5,26.9 11.5,26.9 10.7,26.1 10.7,25 11.4,24.3 13.27,24.3 DISPLAY.30 14.87,25.9 v1(20.2,25.9)
N$52: DISPLAY.18 DISPLAY.32 IC6.30 | length 55.1
  Top w0.3: v1(23.9,23) 23.9,22.6 31.6,14.9 33.343,14.9 IC6.30
  Bottom w0.3: DISPLAY.18 13.3,39.57 13.3,37.5 13.8,37 15.3,37 15.8,36.5 15.8,32.6 15.1,31.9 11.2,31.9 10.2,30.9 10.2,22.6 11.1,21.7 13.21,21.7 DISPLAY.32 14.57,23 v1(23.9,23)
N$53: C14.1 IC6.12 Q3.1 | length 7.7
  Top w0.3: C14.1 33.087,28.921 Q3.1 34.287,28.6 35.2,28.6 37,26.8 37,26.007 IC6.12
N$54: C15.1 IC6.13 Q3.3 | length 4.9
  Top w0.3: Q3.3 34.395,25.562 C15.1 34.445,25.3 37,25.3 IC6.13
N$55: R21.2 X1.2 | length 2.7
  Top w0.3: R21.2 84.805,13.018 X1.2
N$56: R22.2 X1.3 | length 5.3
  Top w0.3: R22.2 82.253,14.3 85.562,14.3 X1.3
N$58: L4.P$2 L5.1 | length 1.8
  Top w1: L4.P$2 86,52.45 L5.1
N$59: C50.2 IC1.32 IC1.40 R9.2 | length 15.9
  Top w0.2: IC1.40 54.65,62.65 55,63 v1(55,63.4) ; IC1.32 59.2,59.35 R9.2@59.375,59.525 ; v1(59.5,58.5) R9.2 R9.2@59.375,59.525 ; C50.2 59.55,59.7 R9.2@59.375,59.525
  Bottom w0.3: v1(55,63.4) 57.8,63.4 59.5,61.7 v1(59.5,58.5)
N$60: C25.1 IC6.14 J1.3 R29.2 | length 38.1
  Top w0.3: IC6.14 38.393,23.2 v1(38.4,23.2) ; v1(39.9,21.7) 41.9,19.7 51.9,19.7 52.6,19 53.1,19 v1(54.4,20.3) ; v1(54.4,22.2) 54.4,24.8 56.2,26.6 58.55,26.6 R29.2 v1(61.1,25.4) C25.1
  Bottom w0.3: v1(38.4,23.2) v1(39.9,21.7) ; v1(54.4,20.3) v1(54.4,22.2) ; v1(61.1,25.4) 61.1,22.075 J1.3
N$61: DISPLAY.37 R30.1 | length 8.4
  Top w1: DISPLAY.37 10,13.41 10,10.1 10.615,9.485 R30.1
N$62: DISPLAY.13 IC6.39 | length 49.7
  Top w0.3: DISPLAY.13 12,45.2 13.3,43.9 13.3,42.8 14,42.1 14.9,42.1 18.7,38.3 18.7,25.7 33.2,11.2 36.007,11.2 IC6.39
N$63: DISPLAY.15 IC6.40 | length 48.3
  Top w0.3: DISPLAY.15 12,42.6 13.3,41.3 13.3,40.3 14.1,39.5 15.2,39.5 18.2,36.5 18.2,25.5 33,10.7 36.214,10.7 IC6.40
N$64: DISPLAY.17 IC6.41 | length 46.9
  Top w0.3: DISPLAY.17 12,40.2 13.3,38.9 13.3,37.5 13.8,37 15,37 17.7,34.3 17.7,25.3 32.8,10.2 36.421,10.2 IC6.41
N$65: DISPLAY.19 IC6.42 | length 45.3
  Top w0.3: DISPLAY.19 12,37.5 13.2,36.3 13.2,35.2 14,34.4 15,34.4 17.2,32.2 17.2,25.1 32.6,9.7 36.628,9.7 IC6.42
N$66: JP1.2 X1.1 | length 6.9
  Bottom w1: JP1.2 84.825,22.405 X1.1
N$67: D5.C R6.1 SG1.+ | length 22.3
  Top w1: R6.1 18.722,69.873 SG1.+ 31.449,75.651 D5.C
N$68: DISPLAY.21 IC6.43 | length 43.9
  Top w0.3: DISPLAY.21 12,35 13.3,33.7 13.3,32.5 13.9,31.9 15.1,31.9 16.7,30.3 16.7,24.9 32.4,9.2 36.836,9.2 IC6.43
N$69: DISPLAY.23 IC6.44 | length 42.4
  Top w0.3: DISPLAY.23 12,32.6 13.3,31.3 13.3,30.1 14,29.4 15.2,29.4 16.2,28.4 16.2,24.7 32.2,8.7 37.043,8.7 IC6.44
N$70: DISPLAY.25 IC6.45 | length 40.8
  Top w0.3: DISPLAY.25 12,29.8 13.3,28.5 13.3,27.5 13.9,26.9 15,26.9 15.7,26.2 15.7,24.5 32,8.2 37.25,8.2 IC6.45
N$71: DISPLAY.27 IC6.46 | length 39.3
  Top w0.3: DISPLAY.27 12,27.3 13.2,26.1 13.2,25.1 14,24.3 15.2,24.3 31.8,7.7 37.457,7.7 IC6.46
N$72: D5.A Q2.3 SG1.- | length 11.1
  Top w1: SG1.- 30.449,69.149 ; Q2.3 30.3,69 30.449,69.149 ; D5.A 30.449,69.149
RX: IC6.69 UART.1 | length 11.6
  Top w0.3: IC6.69 52.343,14.2 59.587,14.2 UART.1
SD_CS: DISPLAY.36 IC6.26 | length 24.6
  Top w0.3: DISPLAY.36 20.05,17.95 26.1,11.9 v1(26.1,11.4) ; v1(31.2,16.5) 32.115,16.5 IC6.26@33.477,17.863
  Bottom w0.3: v1(26.1,11.4) v1(31.2,16.5)
SWCLK: IC6.76 J1.4 | length 16.4
  Top w0.3: IC6.76 53.785,21.2 56.7,21.2 57.6,20.3 57.6,17.1 58.4,16.3 v1(61.1,16.3)
  Bottom w0.3: v1(61.1,16.3) 61.1,18.925 J1.4
SWDIO: IC6.72 J1.2 | length 13.1
  Top w0.3: IC6.72 52.864,15.8 56.4,15.8 56.8,16.2 v1(56.8,19.7)
  Bottom w0.3: v1(56.8,19.7) 60.605,19.7 J1.2
TFT_CS: DISPLAY.29 IC6.24 | length 25
  Top w0.3: v1(20.2,26.9) 27.622,26.9 IC6.24
  Bottom w0.3: DISPLAY.29 13.33,26.9 v1(20.2,26.9)
TFT_RD: DISPLAY.11 IC6.9 | length 37.7
  Top w0.3: v1(17.9,43.6) 18.9,42.6 23.2,42.6 38.2,27.6 38.2,26.928 IC6.9
  Bottom w0.3: DISPLAY.11 13.23,47.2 15.8,47.2 17.9,45.1 v1(17.9,43.6)
TFT_RS: DISPLAY.7 IC6.7 | length 43.4
  Top w0.3: DISPLAY.7 13.3,52.21 13.3,45.3 14,44.6 22.6,44.6 39.2,28 39.2,27.343 IC6.7
TFT_RST: DISPLAY.33 IC6.25 | length 22.6
  Top w0.3: v1(26,21.8) 32.015,21.8 IC6.25
  Bottom w0.3: DISPLAY.33 12.89,20.49 14.2,21.8 v1(26,21.8)
TFT_WR: DISPLAY.9 IC6.8 | length 39.4
  Top w0.3: v1(19.4,43.6) 22.9,43.6 38.7,27.8 38.7,27.136 IC6.8
  Bottom w0.3: DISPLAY.9 13.27,49.7 15.6,49.7 19.4,45.9 v1(19.4,43.6)
TOUCH_CS: DISPLAY.20 IC6.10 | length 29.8
  Top w0.3: v1(20.7,38.3) 26.7,38.3 37.7,27.3 37.7,26.721 IC6.10
  Bottom w0.3: DISPLAY.20 14.57,38.3 v1(20.7,38.3)
TOUCH_IRQ: DISPLAY.28 IC6.23 | length 22.6
  Top w0.3: v1(20.2,28.1) 27.129,28.1 IC6.23
  Bottom w0.3: DISPLAY.28 20.19,28.11 v1(20.2,28.1)
TX: IC6.68 UART.3 | length 18.4
  Top w0.3: IC6.68 52.136,13.7 57.7,13.7 60.6,10.8 64.348,10.8 UART.3
U+: C43.2 U+.1 | length 4.1
  Top w0.3: U+.1 55.1,72.8 C43.2
U-: C44.2 U-.1 | length 3.5
  Top w0.3: C44.2 U-.1
USB_IDENT: IC6.67 R5.2 | length 32.6
  Top w0.3: IC6.67 51.929,13.2 57.5,13.2 60.4,10.3 66.6,10.3 67.2,10.9 R5.2
USB_N: IC6.70 R21.1 | length 30.5
  Top w0.3: IC6.70@51.155,16.095 52.55,14.7 78,14.7 79.3,13.4 80.048,13.4 R21.1
USB_P: IC6.71 R5.1 R22.1 | length 34.4
  Top w0.3: IC6.71 52.757,15.2 79.653,15.2 R22.1 81.177,14.423 81.3,14.3 81.3,11.75 R5.1
VCC: C17.1 C18.1 C27.1 C34.1 IC1.6 IC1.26 IC2.2 IC2.4 IC3.10 IC3.16 L9.1 | length 81.2
  Top w0.2: C34.1 48.088,58.713 C34.1@48.225,58.85 ; C18.1 C18.1@58.2,53.825 ; L9.1 L9.1@58.2,55.5
  Top w0.3: C34.1@48.088,58.713 48.225,58.85 49,58.85 ; v1(49,58.4) 49,58.85 ; IC1.6 49,58.85 ; IC3.16 50.378,49.278 50.2,49.1 50.2,48.5 50.7,48 51.4,48 52.225,48.825 54.2,48.825 ; IC3.10 54.188,48.838 54.2,48.825 ; IC1.26 57.35,56.35 58.2,55.5 L9.1 58.2,53.825 58.2,49.9 57.125,48.825 C27.1 54.2,48.825 ; C18.1 v1(59.4,53.8)
  Top w1: C18.1 59.6,53.8 60.7,52.7 70.1,52.7 84,66.6 C17.1 90.8,66.6 91,66.8 ; IC2.2 91,66.8 ; IC2.4 91,66.8
  Bottom w0.3: v1(49,58.4) 50.2,57.2 56,57.2 v1(59.4,53.8)
pads on no net: DISPLAY.5 DISPLAY.24 DISPLAY.31 DISPLAY.35 DISPLAY.38 DISPLAY.39 DISPLAY.40 IC1.1 IC1.2 IC1.3 IC1.7 IC1.10 IC1.19 IC1.20 IC1.21 IC1.24 IC1.27 IC1.28 IC1.45 IC6.11 IC6.15 IC6.16 IC6.17 IC6.18 IC6.19 IC6.27 IC6.29 IC6.33 IC6.34 IC6.35 IC6.73 IC6.77 IC6.78 IC6.79 IC6.80 IC6.81 IC6.82 IC6.83 IC6.84 IC6.85 IC6.86 IC6.87 IC6.88 IC6.96 J1.6 X1.M1 X1.M2

## Polygon pours and split planes (outlines as drawn)
AGND on Bottom "Polygon_1_Net_AGND" (solid, remove dead copper, pour order 1): 100.25,80.25 36.55,80.25 36.55,55.796 43.797,48.55 71.104,48.55 72.503,49.95 100.25,49.95
GND on Bottom "Polygon_1_Net_GND" (solid, remove dead copper, pour order 3): 100.95,-1.1 100.95,39.15 80.6,39.15 64.362,39.15 57.062,46.45 42.662,46.45 36.406,52.706 33.95,55.162 33.95,81.35 -11.55,81.35 -11.55,-3.65 100.95,-3.65
AGND on Top "Polygon_2_Net_AGND" (solid, remove dead copper, pour order 0): 100.25,80.25 36.55,80.25 36.55,55.796 43.797,48.55 71.104,48.55 72.503,49.95 100.25,49.95
GND on Top "Polygon_2_Net_GND" (solid, remove dead copper, pour order 2): 100.95,-1.1 100.95,39.15 80.6,39.15 64.362,39.15 57.062,46.45 42.662,46.45 36.406,52.706 33.95,55.162 33.95,81.35 -11.55,81.35 -11.55,-3.65 100.95,-3.65

## Keep-outs
Top:
  circle w0: c4,4 r3
  circle w0: c96,4 r3
  circle w0: c96,76 r3
Keep-Out Layer:
  the board outline again, w0

## Silkscreen, mask and mechanical layers (free items; w line width, h text height)
Top Overlay:
  lines w0.1: 32.2,50.7 38,50.7 ; 38,36 38,50.7 ; 45.4,57.7 44.7,57.7 41.5,54.5 38,51 38,50.7
  text "TX" at 67.9,12.2 h0.86
  text "RX" at 57.8,12.1 h0.86
  text "5V" at 73.2,8.5 h0.86 r90
  text "C7" at 68.2,8.4 h0.86 r90
  text "C9" at 70.7,8.4 h0.86 r90
  text "B2" at 47.8,8.3 h0.86 r90
  text "B11" at 50.4,8.3 h0.86 r90
  text "B13" at 52.9,8.3 h0.86 r90
  text "B15" at 55.5,8.3 h0.86 r90
  text "D9" at 58,8.3 h0.86 r90
  text "D11" at 60.6,8.3 h0.86 r90
  text "D13" at 63.1,8.3 h0.86 r90
  text "D15" at 65.6,8.3 h0.86 r90
  text "3V3" at 42.3,4.3 h0.86 r90
  text "C6" at 68.2,1.3 h0.86 r90
  text "C8" at 70.7,1.3 h0.86 r90
  text "B1" at 47.9,1.1 h0.86 r90
  text "D8" at 58.1,1.1 h0.86 r90
  text "B10" at 50.4,0.3 h0.86 r90
  text "B12" at 52.9,0.3 h0.86 r90
  text "B14" at 55.4,0.3 h0.86 r90
  text "D10" at 60.6,0.3 h0.86 r90
  text "D12" at 63.2,0.3 h0.86 r90
  text "D14" at 65.6,0.3 h0.86 r90
  text "GND" at 45.3,0.2 h0.86 r90
  text "GND" at 73.3,0.2 h0.86 r90
Bottom Overlay:
  text "I+" at 46,69 h1.86 r270
  text "I-" at 50,69 h1.86 r270
  text "U+" at 54.7,69 h1.86 r270
  text "U-" at 58.2,69 h1.86 r270
  text "03/2020" at 75,48 h1.64 r180
  text "github.com/jankae/LCR" at 59,45 h1.64 r180
  text "LCR Meter" at 64,42 h2.16 r180
Dimension:
  lines w0: 0,2 ccw(c2,2) 2,0 98,0 ccw(c98,2) 100,2 100,78 ccw(c98,78) 98,80 2,80 ccw(c2,78) 0,78 0,2
  lines w0.152: 0,2 0,78
tPlace:
  lines w0.152: 78,20 80,20 82,22 ; 81,22 82,22 ; 82,21 82,22
  text "ON/OFF" at 70,20.515 h1.42
  text "Switch" at 70,18 h1.42

## Text inside footprints (layer, text, board x,y; h text height)
DISPLAY: tPlace "2" at 3.999,60.495 h1.97; tPlace "4" at 3.999,57.955 h1.97; tPlace "6" at 3.999,55.415 h1.97; tPlace "8" at 3.999,52.875 h1.97; tPlace "10" at 3.745,50.335 h1.97; tPlace "12" at 3.745,47.795 h1.97; tPlace "14" at 3.745,45.255 h1.97; tPlace "16" at 3.745,42.715 h1.97; tPlace "18" at 3.745,40.175 h1.97; tPlace "20" at 3.872,37.635 h1.97; tPlace "22" at 3.872,35.095 h1.97; tPlace "24" at 3.872,32.555 h1.97; tPlace "26" at 3.872,30.015 h1.97; tPlace "28" at 3.872,27.475 h1.97; tPlace "30" at 3.872,24.935 h1.97; tPlace "32" at 3.872,22.395 h1.97; tPlace "34" at 3.872,19.855 h1.97; tPlace "36" at 3.872,17.315 h1.97; tPlace "38" at 3.872,14.775 h1.97; tPlace "40" at 3.872,12.235 h1.97